# EAGLE board thpg-sht (EAGLE 9.3.0)
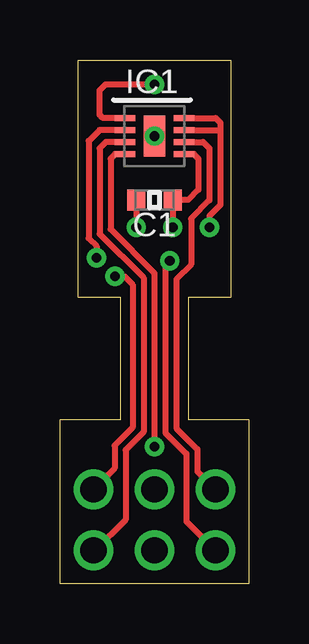
[diagram p0: board, top side]
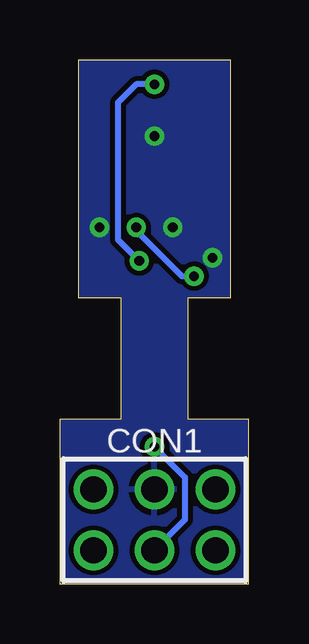
[diagram p1: board, bottom side, seen from below]

Size 7.87 x 21.84 mm. Coordinates in mm from the lower left corner, seen from the top.
Outline: 0,0 0,6.86 2.54,6.86 2.54,11.94 0.76,11.94 0.76,21.84 7.11,21.84 7.11,11.94 5.33,11.94 5.33,6.86 7.87,6.86 7.87,0 0,0
Copper layers (1*16): Top 0.035mm / dielectric 1.5mm / Bottom 0.035mm
Design rules "qfn": minimum track width 10mil, minimum drill 0.4mm, track to track 8mil, track to pad 10mil, pad to pad 8mil, via to via 8mil, smd to smd 0mil, copper to edge 0mil, drill to drill 6mil, minimum pad ring 10mil, minimum via ring 8mil, stop-mask expansion 4mil, vias tented up to drill 25mil, thermal gap 10mil

## Footprints (pad centres in the part's own frame; a part is rotated, then mirrored left to right if it is on the bottom)
0603 = smd 0.762 x 0.889: 1 -0.762,0; 2 0.762,0
HEADER-6P-2R-DIP-2_54MM = drill 1.1 pad 1.65: 1 -2.54,-1.27; 2 0,-1.27; 3 2.54,-1.27; 4 -2.54,1.27; 5 0,1.27; 6 2.54,1.27
SHT3X-DIS = smd 0.85 x 0.254: 1 -1.225,0.75; 2 -1.225,0.25; 3 -1.225,-0.25; 4 -1.225,-0.75; 5 1.225,-0.75; 6 1.225,-0.25; 7 1.225,0.25; 8 1.225,0.75 | smd 0.9 x 1.7: 9 0,0

## Placement (x,y rotation side)
C1  [0603]  3.94,16 0 top
CON1  [HEADER-6P-2R-DIP-2_54MM]  3.94,2.67 180 bottom
IC1  [SHT3X-DIS]  3.94,18.67 0 top

## Library data of the parts
C1 CON1 IC1 = SamacSys_Parts

## Nets
GND: C1.1 CON1.2 IC1.2 IC1.7 IC1.8 IC1.9
N$1: CON1.3 IC1.6
N$2: CON1.6 IC1.1
N$3: CON1.5 IC1.4
N$5: CON1.4 IC1.3
VCC: C1.2 CON1.1 IC1.5

## Tracks (layer width: path | path; a pad name or v marks a point on that pad's centre or on a via)
GND  (via drill 0.4)
  Top 0.254: IC1.2 1.65,18.92 1.19,18.47 1.19,14.4 1.52,14.07 v1.52,13.59 | C1.1 v3.17,14.86 | IC1.8 6.49,19.42 6.68,19.23 6.68,18.92 | v6.22,14.86 6.22,15.34 6.68,15.8 6.68,18.92 | IC1.7 6.68,18.92
  other vias: 3.94,18.67
  pour Bottom: 0.13,0.13 0.13,6.73 2.67,6.73 2.67,12.06 0.89,12.06 0.89,21.72 6.99,21.72 6.99,12.06 5.21,12.06 5.21,6.73 7.75,6.73 7.75,0.13
N$1
  Top 0.254: CON1.3 5.73,4.69 5.73,5.61 4.85,6.48 4.85,12.7 5.46,13.31 5.46,15.23 6.22,15.99 6.22,18.16 5.96,18.42 IC1.6
N$2  (via drill 0.4)
  Top 0.254: v4.57,13.46 4.39,13.28 4.39,6.29 5.27,5.42 5.27,2.6 CON1.6 | IC1.1 1.79,19.42 1.65,19.56 1.65,20.57 1.91,20.83 v3.94,20.83
  Bottom 0.254: v3.94,20.83 4.7,20.83 5.46,20.07 5.46,14.35 v4.57,13.46
N$3  (via drill 0.4)
  Top 0.254: v3.94,5.71 3.94,12.95 2.11,14.78 2.11,17.73 2.3,17.92 IC1.4
  Bottom 0.254: v3.94,5.71 2.67,4.45 2.67,2.67 CON1.5
N$5
  Top 0.254: IC1.3 1.91,18.42 1.65,18.16 1.65,14.59 3.48,12.77 3.48,6.33 2.73,5.58 2.73,2.67 1.45,1.4 CON1.4
VCC  (via drill 0.4)
  Top 0.254: v4.7,14.86 C1.2 5.33,16 5.77,16.43 5.77,17.73 5.58,17.92 IC1.5 | v2.29,12.83 2.67,12.83 3.02,12.47 3.02,6.52 2.27,5.77 2.27,4.81 CON1.1
  Bottom 0.254: v4.7,14.86 4.7,14.73 2.79,12.83 v2.29,12.83